# Altium PCB BGV1.0.PcbDoc
Units mil, origin at the board's own origin, x right, y up, seen from the top; angles counter-clockwise.
Board outline 6000 x 4000 mil, 2 copper layers (Top Layer, Bottom Layer); 20 components, 16 nets, 70 pads, 68 vias.
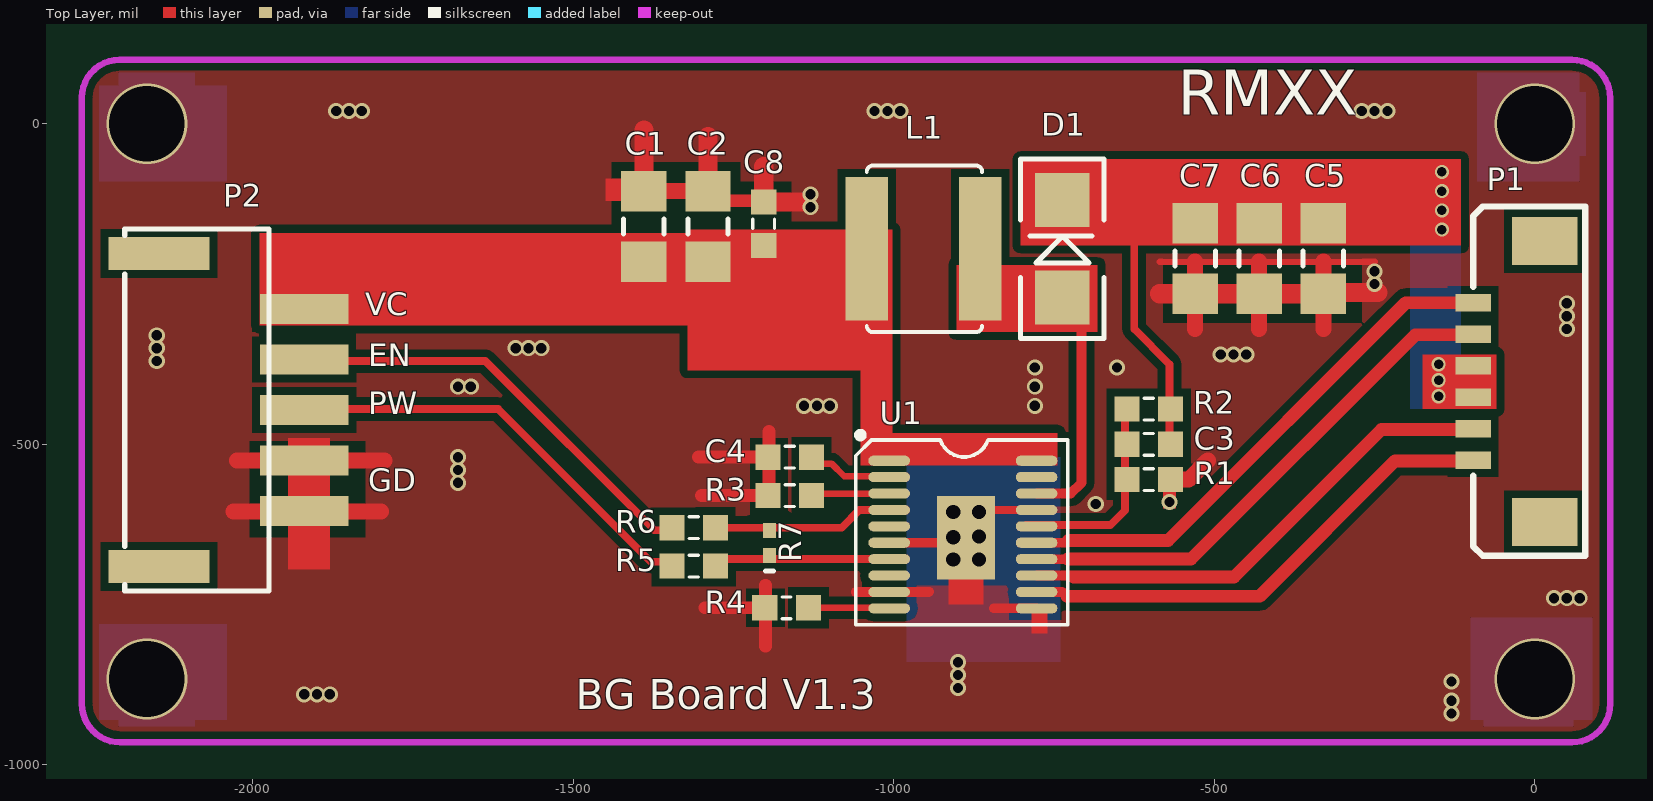
[diagram p0: Top Layer view]
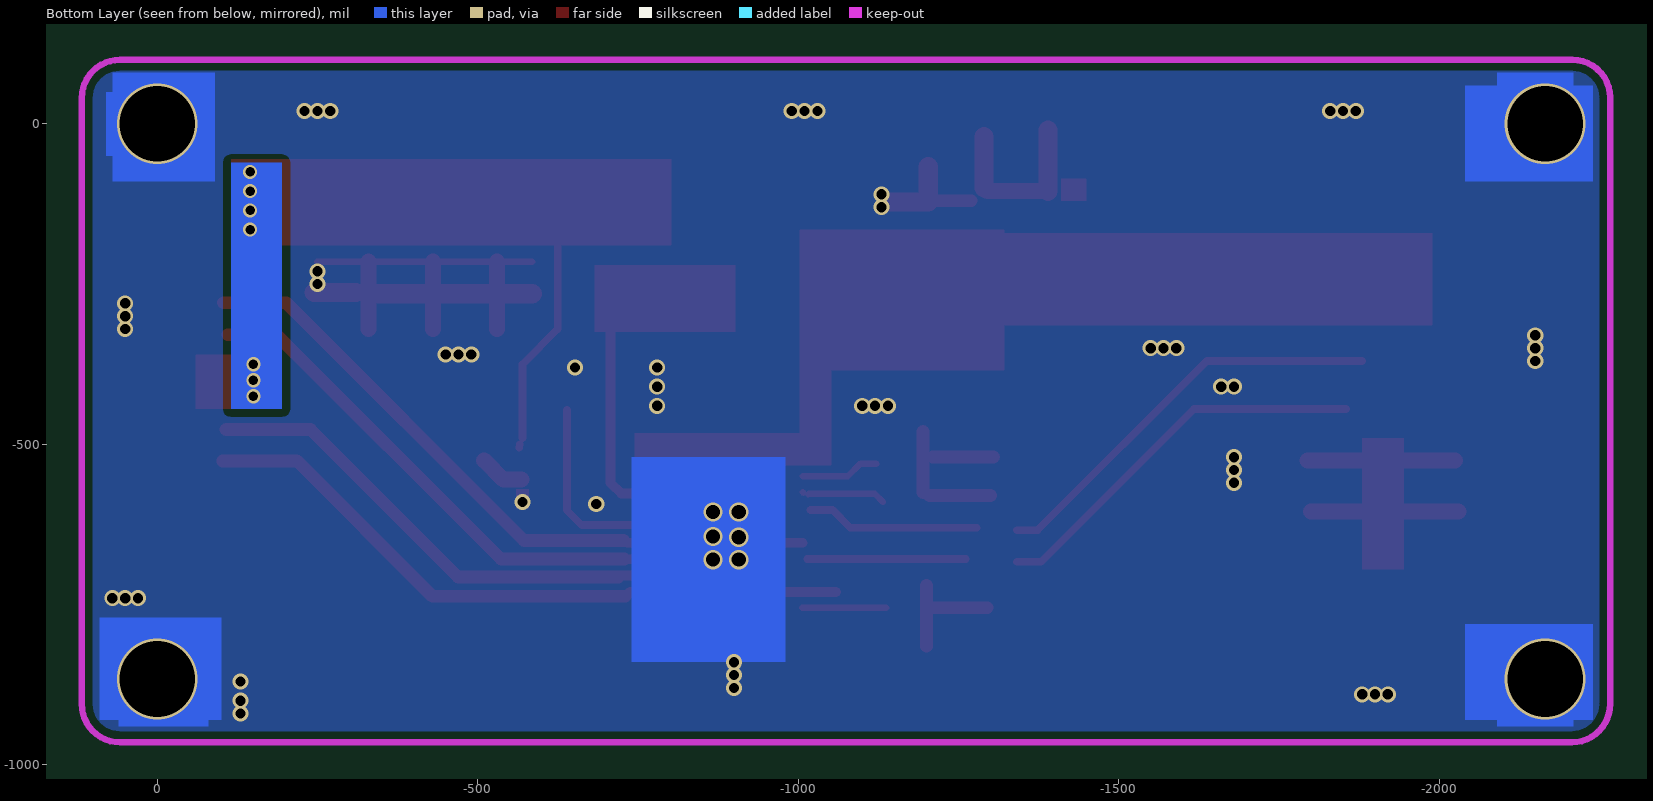
[diagram p1: Bottom Layer view, seen from below]

## Layer stack, top to bottom
Top Solder: solder mask 0.4, Solder Resist, Dk 3.5
Top Layer: signal copper 1.4
Dielectric1: dielectric 12.6, FR-4, Dk 4.8
Bottom Layer: signal copper 1.4
Bottom Solder: solder mask 0.4, Solder Resist, Dk 3.5

## Board outline
-2882.28,-2560 3117.72,-2560 3117.72,1440 -2882.28,1440

## Design rules (kind name [scope] priority, off if disabled: settings)
Clearance [All] p1 off: gap=12
ComponentClearance [All] p1: gap=5 collisioncheckmode=3 verticalgap=5 showdistances=FALSE
FabricationTestPointUsage TestPointUsage [All] p1: valid=0 allowmultiple=FALSE
FabricationTestpoint Testpoint [(IsPad And (OnTopLayer Or OnBottomLayer))] p1: side=3 testpointundercomponent=TRUE minsize=40 maxsize=100 preferedsize=60 minholesize=0 maxholesize=40 preferedholesize=32 testpointgrid=1 allowsidetop=TRUE allowsidebottom=TRUE usegrid=TRUE gridtolerance=0.01
PolygonConnect [All] p1: connectstyle=Direct reliefconductorwidth=10 reliefentries=4 polygonreliefangle="90 Angle" airgapwidth=10
RoutingVias [All] p1: holewidth=12 width=22 viastyle="Through Hole" minholewidth=8 minwidth=10 maxholewidth=200 maxwidth=150
SolderMaskExpansion [All] p1: expansion=4
Width [All] p1: maxlimit=100 minlimit=10 preferedwidth=10 minimp=50.000000 maximp=50.000000 favimp=50.000000
27 further rules are at their usual default settings.

## Components (designator, comment, footprint, x,y, rotation, side; value= is the part's Value field where it differs from the comment)
C1 "Cap" 3216[1206] -1390,-160 r270 top
C2 "Cap" 3216[1206] -1290,-160 r270 top
C3 "Cap" 0603 -602.28,-500 r0 top
C4 "Cap" 0603 -1162.28,-520 r0 top
C5 "Cap" 3216[1206] -330,-210 r90 top
C6 "Cap" 3216[1206] -430,-210 r90 top
C7 "Cap" 3216[1206] -530,-210 r90 top
C8 "Cap" 0603 -1203,-156 r90 top
D1 "Diode 1N4448" SMA -737.28,-195 r90 top
L1 "Inductor" L-6045 -1042.28,-195 r0 top
P1 "Header 6" 1.25MM-6P -96.28,-279 r90 top
P2 "Header 5" PH2.0-5P-SMT -1920,-604 r90 top
R1 "Res1" 0603 -602.28,-555 r180 top
R2 "Res1" 0603 -602.28,-445 r0 top
R3 "Res1" 0603 -1162.28,-580 r0 top
R4 "Res1" 0603 -1167.28,-755 r180 top
R5 "Res1" 0603 -1312.28,-690 r180 top
R6 "Res1" 0603 -1312.28,-630 r180 top
R7 "Res1" 0402-A -1194,-654 r90 top
U1 "TPS61194" ? -1007.28,-525.59 r0 top

## Footprints (in the part's own frame and the unit in brackets; to place one, negate y for a bottom-side part, rotate by r counter-clockwise, add the part's x,y. Pads: shape width x height; smd on the part's side, far side on the other; paste and mask are expansions set on the pad)
1.25MM-6P [mm]
  rect 1.9x2.6 smd: 0(-8.7,-2.835) 0(2.45,-2.835)
  rect 0.7x1.4 smd: 1(-6.25,0) 2(-5,0) 3(-3.75,0) 4(-2.5,0) 5(-1.25,0) 6(0,0)
  silkscreen extent -10.03,-4.45 3.81,0
0402-A [mm] "Chip Inductor, Body 1.0x0.5mm, IPC High Density"
  rect 0.6x0.5 smd: 1(-0.5,0) 2(0.5,0)
  silkscreen extent -1.1,-0.15 -1.1,0.15, body extent -0.55,-0.3 0.55,0.3, height 0.55
0603 [mm]
  rect 1x1 smd: 1(-0.864,0) 2(0.864,0)
  silkscreen extent -0.18,-0.43 0.18,0.43
3216[1206] [mm] "Chip Resistor; Body 3.2 x 1.6 mm (LxW typ)"
  rect 1.6x1.8 smd: 1(-1.4,0) 2(1.4,0)
  silkscreen extent -0.3,-0.8 0.3,0.8
L-6045 [mm]
  rect 1.7x5.7 smd: 1(0,0) 2(4.5,0)
  silkscreen extent 0,-3.3 4.57,3.3
PH2.0-5P-SMT [mm]
  rect 1.3x4 smd: 0(-2.2,5.75) 0(10.2,5.75)
  rect 1.2x3.5 smd: 1(0,0) 2(2,0) 3(4,0) 4(6,0) 5(8,0)
  silkscreen extent -3.18,1.4 11.18,7.11
SMA [mm] "Molded Diode, 2-Leads, Body 4.3x2.7mm, IPC Medium Density"
  rect 2.15x2.15 smd: 1(-1.93,0) 2(1.93,0)
  silkscreen extent -3.56,-1.65 3.56,1.65, body extent -2.28,-1.42 2.29,1.42, height 2.95
? [mm]
  oval 1.65x0.4 smd: 1(0,0) 2(0,-0.65) 3(0,-1.3) 4(0,-1.95) 5(0,-2.6) 6(0,-3.25) 7(0,-3.9) 8(0,-4.55) 9(0,-5.2) 10(0,-5.85) 11(5.842,-5.85) 12(5.842,-5.2) 13(5.842,-4.55) 14(5.842,-3.9) 15(5.842,-3.25) 16(5.842,-2.6) 17(5.842,-1.95) 18(5.842,-1.3) 19(5.842,-0.65) 20(5.842,0)
  rect 2.286x3.302 smd: 21(3.048,-3.048)
  silkscreen extent -1.32,-6.5 7.07,1.14, body extent 0.64,-6.2 5.08,0.28, height 2.65

## Part data
C1 C2 C3 C4 C5 C6 C7 C8: "Capacitor"
D1: "High Conductance Fast Diode"
P1: "Header, 6-Pin"
P2: "Header, 5-Pin"
R1 R2 R3 R4 R5 R6 R7: "Resistor"

## Via types
v1: diameter 25, hole 16, Top Layer to Bottom Layer, 51 vias
v2: diameter 22, hole 15, Top Layer to Bottom Layer, 7 vias
v3: diameter 30, hole 22, Top Layer to Bottom Layer, 6 vias
v4: diameter 125.98, hole 118.11, Top Layer to Bottom Layer, 4 vias

## Nets (pads, with @x,y where several pads share a name; then routed paths per layer and width w, separated by ;. In a path a pad name is that pad's centre, name@x,y a point inside that pad or via, vN(x,y) a via of type N, cw(c..) or ccw(c..) an arc to the next point about the centre after c; other vN are vias at no path point)
EN: P2.4 R6.2 | length 648.1
  Top Layer w12: P2.4@-1880,-370 -1637.28,-370 -1373.28,-634 R6.2@-1341.28,-634
GND: C1.1 C2.1 C4.1 C5.1 C6.1 C7.1 C8.2 P2.1 P2.2 R1.1 R3.1 R4.2 U1.6 U1.9 U1.11 U1.17 U1.21 | length 2767.7
  Top Layer w10: -585,-215 -530,-215 -250,-215
  Top Layer w12: U1.21@-860,-602 -859.64,-602.36 U1.17
  Top Layer w15: -1059.68,-730.32 U1.9 -945.32,-730.32 -945,-730 ; U1.6 U1.21@-924.83,-653.54 ; -844.09,-755.91 U1.11
  Top Layer w20: -1305,-520 C4.1@-1210,-520 ; -1300,-580 R3.1@-1205,-580 ; -1295,-755 R4.2@-1200,-755 ; C2.1@-1270,-119.88 C8.2@-1215,-119.88 ; -1200,-815 -1200,-720 ; R3.1@-1195,-575 -1195,-480
  Top Layer w25: -2030,-605 -1800,-605 ; -2025,-525 -1795,-525 ; C1.1@-1390,-105 C2.1@-1295,-105 ; R1.1 -540,-555 -510,-525 ; -530,-320 -530,-215 ; -430,-320 -430,-215 ; -330,-320 -330,-215
  Top Layer w30: C1.1@-1390,-105 C1.1 -1390,-10 ; C2.1@-1290,-100 -1290,-20 ; -1203,-67 C8.2 v1@-1138,-122 ; -585,-265 C5.1@-330,-265 ; C5.1@-310,-263.14 -245,-263.14
  other v1: -130,-920 -130,-900 -1920,-890 -1900,-890 -1880,-890 -900,-880 -130,-870 -900,-860 -900,-840 30,-740 50,-740 70,-740 -685,-593 -570,-590 -1680,-560 -1680,-540 -1680,-520 -1140,-440 -1120,-440 -1100,-440 -780,-440 -1680,-410 -1660,-410 -780,-410 -780,-380 -652,-380 -2150,-370 -490,-360 -470,-360 -450,-360 -2150,-350 -1590,-350 -1570,-350 -1550,-350 -2150,-330 50,-320 50,-300 50,-280 -250,-250 -250,-230 -1130,-130 -1130,-110 -1870,20 -1850,20 -1830,20 -1030,20 -1010,20 -990,20 -270,20 -250,20 -230,20
  other v3: -907.28,-680 -867.28,-680 -907.28,-645 -867.28,-644 -907.28,-605.59 -867.28,-605.59
  other v4: -2165.35,-866.14 0,-866.14 -2165.35,0 0,0
NetC3_1: C3.1 R1.2 R2.1 U1.16 | length 320.5
  Top Layer w12: U1.16@-793.28,-625.95 -662.24,-625.95 -639.28,-603 R2.1@-639.28,-446
NetC3_2: C3.2 C5.2 C6.2 C7.2 D1.2 P1.3 P1.4 R2.2 | length 343.1
  Top Layer w12: -625,-175 -625,-320 -570,-375 C3.2@-570,-490 ; C3.2@-565.58,-499.7 C3.2@-565,-505
  other v2: -150,-425 -150,-400 -150,-375 -145,-165 -145,-135 -145,-105 -145,-75
NetC4_2: C4.2 U1.2 | length 123.3
  Top Layer w10: C4.2@-1122.28,-530 -1097.28,-530 -1077.28,-550 U1.2@-1007.28,-550
NetD1_1: D1.1 L1.2 U1.18 | length 344
  Top Layer w15: U1.18 -724.06,-576.77 -707.28,-560 -707.28,-300 D1.1@-702.28,-295
NetP1_1: P1.1 U1.12 | length 765.1
  Top Layer w15: U1.12 -736.97,-730.32 -730.28,-737
  Top Layer w20: -730.28,-737 -429.28,-737 -218.35,-526.06 P1.1@-102.28,-526.06
NetP1_2: P1.2 U1.13 | length 764.1
  Top Layer w15: U1.13 -720.56,-704.72
  Top Layer w20: -719.28,-707 -469.28,-707 -239.13,-476.85 P1.2@-107.28,-476.85
NetP1_5: P1.5 U1.14 | length 812
  Top Layer w15: U1.14 -728.74,-679.13
  Top Layer w20: -728.74,-679.13 -536.42,-679.13 -186.28,-329 P1.5@-110.28,-329
NetP1_6: P1.6 U1.15 | length 829
  Top Layer w15: U1.15 -733.83,-653.54 -728.28,-648
  Top Layer w20: -727.28,-650 -572.28,-650 -201.28,-279 P1.6@-103.28,-279
NetR3_2: R3.2 U1.3 | length 123.5
  Top Layer w10: R3.2@-1132.28,-590 -1119.28,-577 -1017,-577 U1.3@-1016,-578 ; U1.3@-1008.28,-576 U1.3@-1007.28,-575
NetR4_1: R4.1 U1.10 | length 131
  Top Layer w10: R4.1@-1137.28,-755 U1.10@-1006.28,-755
NetR5_1: R5.1 R7.1 U1.7 | length 247
  Top Layer w12: R5.1@-1261.28,-679 U1.7@-1014.28,-679
NetR6_1: R6.1 R7.2 U1.4 | length 270.4
  Top Layer w12: R6.1 -1081.28,-630 -1053.65,-602.36 U1.4@-1019.28,-602.36
PWM: P2.3 R5.2 | length 612.3
  Top Layer w12: P2.3@-1855,-445 -1617.28,-445 -1379.28,-683 R5.2@-1341.28,-683
VCC: C1.2 C2.2 C8.1 L1.1 P2.5 U1.1 U1.20
pads on no net: P1.0 P2.0 U1.5 U1.8 U1.19

## Polygon pours and split planes (outlines as drawn)
GND on Bottom Layer "GND_L02_P028" (solid, remove dead copper, pour order 28): -2626,228 263,228 215,180 215,-1159 -2343,-1159 -2431,-1071
GND on Top Layer "GND_L01_P036" (solid, remove dead copper, pour order 36): -2490,240 -2470,260 305,260 305,-930 205,-1030 140,-1095 -2425,-1095

## Keep-outs
Keep-Out Layer:
  lines w10: -2267,-905.28 -2267,41.28 ; -2266.72,-905.28 ccw(c-2207,-905.28) -2207,-965 58,-965 ccw(c58,-905.28) 117.72,-905.28 117.72,40.28 ccw(c58,40.28) 58,100 -1802.28,100 -2208,100 ccw(c-2208,41.28) -2266.72,41.28

## Other copper
Top Layer:
  rectangle net GND: -915,-750 -860,-700
  rectangle net GND: -785,-795 -760,-755
  rectangle net GND: -1450,-120 -1410,-85
  rectangle net GND: -1945,-695 -1880,-490
  rectangle net NetC3_2: -175,-445 -60,-360
  rectangle net NetC3_2: -802.28,-190 -115,-55
  rectangle net NetD1_1: -902.28,-325 -682.28,-220
  rectangle net VCC: -1322.28,-385 -1002.28,-165
  rectangle net VCC: -1052.28,-533 -1002.28,-375
  rectangle net VCC: -1014.28,-533 -744.28,-482
  rectangle net VCC: -1990,-315 -1265,-170
  rectangle net GND: -580,-600 -560,-570
  pour cut-out: -2005,-495 -2005,-645 -1825,-645 -1825,-495
  pour cut-out: -1225,-490 -1165,-490 -1165,-550 -1225,-550
  pour cut-out: -1225,-550 -1165,-550 -1165,-610 -1225,-610
  pour cut-out: -1230,-725 -1170,-725 -1170,-785 -1230,-785
  pour cut-out: -1049.61,-720 -965,-720 -965,-745 -965,-750 -970,-750 -1049.61,-750
  pour cut-out: -820,-740 -820,-773.62 -738.58,-773.62 -738.58,-741.42 -740,-740
  pour cut-out: -580,-310 -270,-310 -270,-210 -580,-210
  pour cut-out: -1440,-60 -1240,-60 -1240,-90 -1160,-90 -1160,-160 -1440,-160
  pour cut-out: -970,-540 -820,-540 -830,-710 -820,-720 -965,-720
  pour cut-out: -1255,-640 -1060,-640 -1040,-620 -1005,-655 -1250,-655 -1260,-665
Bottom Layer:
  rectangle net NetC3_2: -195,-445 -115,-60
  rectangle net GND: -2240,-930 -2040,-780
  rectangle net GND: -2210,-940 -2090,-910
  rectangle net GND: -100,-930 90,-770
  rectangle net GND: -80,-940 60,-920
  rectangle net GND: -90,-90 70,80
  rectangle net GND: 60,-50 80,50
  rectangle net GND: -2240,-90 -2040,60
  rectangle net GND: -2210,50 -2090,80
  rectangle net GND: -980,-840 -740,-520

## Silkscreen, mask and mechanical layers (free items; w line width, h text height)
Top Overlay:
  text "RMXX" at -557,-9 h120
  text "VC" at -1825,-310 h60
  text "EN" at -1820,-390 h60
  text "PW" at -1820,-465 h60
  text "GD" at -1820,-585 h60
  text "BG Board V1.3" at -1496,-929 h80